# Altium PCB PCB1.PcbDoc
Units mm, origin at the board's own origin, x right, y up, seen from the top; angles counter-clockwise.
Board outline 19.29 x 100 mm, 2 copper layers (Top Layer, Bottom Layer); 23 components, 11 nets, 34 pads, 10 vias.
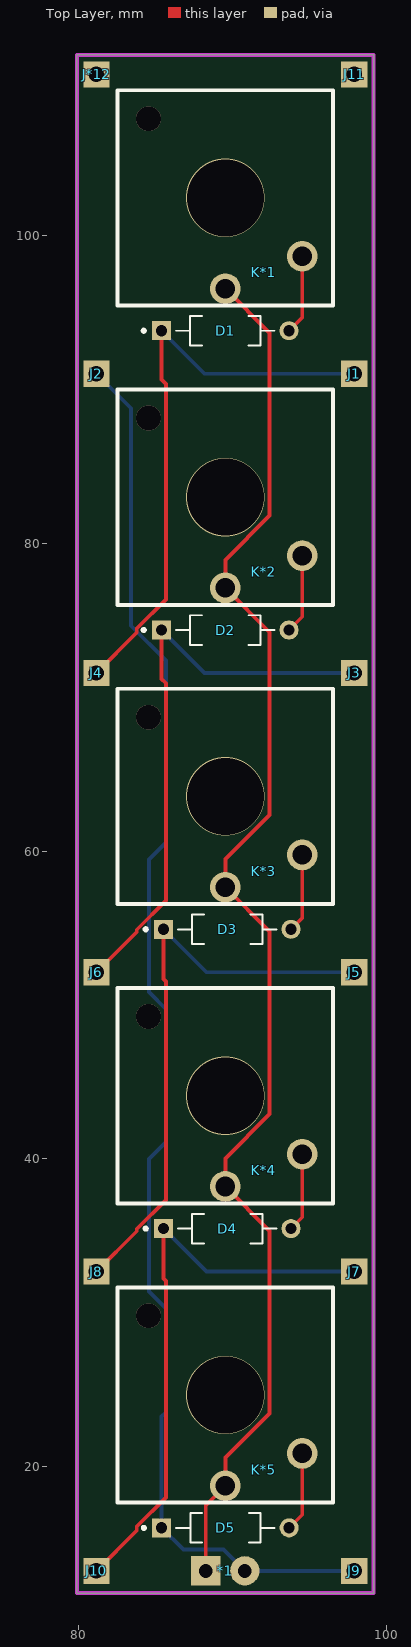
[diagram p0: Top Layer view]
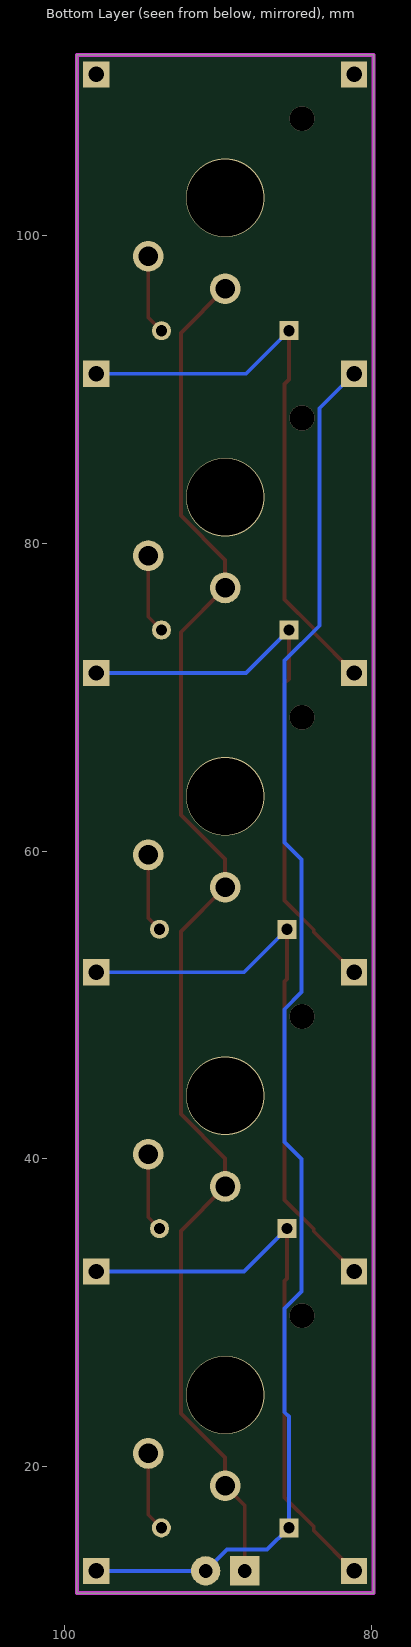
[diagram p1: Bottom Layer view, seen from below]

## Layer stack, top to bottom
Top Solder: solder mask 0.0102, Solder Resist, Dk 3.5
Top Layer: signal copper 0.0356
Dielectric 1: dielectric 0.32, FR-4, Dk 4.8
Bottom Layer: signal copper 0.0356
Bottom Solder: solder mask 0.0102, Solder Resist, Dk 3.5

## Board outline
79.883,11.76 79.883,111.76 99.173,111.76 99.173,11.76

## Design rules (kind name [scope] priority, off if disabled: settings)
Clearance [All] p1: gap=0.203 ignorepadtopadclearanceinfootprint=FALSE
PolygonConnect [All] p1: connectstyle=Relief reliefconductorwidth=0.254 reliefentries=4 polygonreliefangle="90 Angle" airgapwidth=0.254
RoutingVias [All] p1: holewidth=0.711 width=1.27 viastyle="Through Hole" minholewidth=0.711 minwidth=1.27 maxholewidth=0.711 maxwidth=1.27
SolderMaskExpansion [All] p1: expansion=0.102 istentingtop=FALSE
Width [All] p1: maxlimit=0.254 minlimit=0.254 preferedwidth=0.254
30 further rules are at their usual default settings.

## Components (designator, comment, footprint, x,y, rotation, side; value= is the part's Value field where it differs from the comment)
*1 "2Pin" TH2.54-2pin 89.528,13.208 r0 top locked
D1 "1N4148" 1N4148 89.528,93.828 r0 top
D2 "1N4148" 1N4148 89.528,74.371 r0 top
D3 "1N4148" 1N4148 89.655,54.915 r0 top
D4 "1N4148" 1N4148 89.655,35.458 r0 top
D5 "1N4148" 1N4148 89.535,16.002 r0 top
J1 "1Pin" 1PIN#1 97.917,91.313 r90 top
J2 "1Pin" 1PIN#1 81.153,91.313 r90 top
J3 "1Pin" 1PIN#2 97.917,74.041 r90 top
J4 "1Pin" 1PIN#3 81.153,72.517 r90 top
J5 "1Pin" 1PIN#4 97.917,52.959 r90 top
J6 "1Pin" 1PIN#5 81.153,53.34 r90 top
J7 "1Pin" 1PIN#6 97.917,33.655 r90 top
J8 "1Pin" 1PIN#7 81.153,34.036 r90 top
J9 "1Pin" 1PIN#8 98.552,14.478 r90 top
J10 "1Pin" 1PIN#9 64.389,14.859 r90 top
J11 "1Pin" 1PIN#10 97.917,110.49 r90 top
J*12 "1Pin" 1PIN#10 81.153,110.49 r90 top
K*1 "Choc v2" "CHOCO V2" 89.535,102.464 r270 top
K*2 "Choc v2" "CHOCO V2" 89.535,83.007 r270 top
K*3 "Choc v2" "CHOCO V2" 89.535,63.551 r270 top
K*4 "Choc v2" "CHOCO V2" 89.535,44.094 r270 top
K*5 "Choc v2" "CHOCO V2" 89.535,24.638 r270 top

## Footprints (in the part's own frame and the unit in brackets; to place one, negate y for a bottom-side part, rotate by r counter-clockwise, add the part's x,y. Pads: shape width x height; smd on the part's side, far side on the other; paste and mask are expansions set on the pad)
1N4148 [mm]
  round 1.238 hole 0.73: A(4.146,0)
  rect 1.238x1.238 hole 0.73: C(-4.146,0)
  silkscreen extent -5.4,-0.96 3.2,0.96
1PIN#1 [mm]
  rect 1.7x1.7 hole 1: 1(-0.279,0)
1PIN#2 [mm]
  rect 1.7x1.7 hole 1: 1(-2.464,0)
1PIN#3 [mm]
  rect 1.7x1.7 hole 1: 1(-0.94,0)
1PIN#4 [mm]
  rect 1.7x1.7 hole 1: 1(-0.838,0)
1PIN#5 [mm]
  rect 1.7x1.7 hole 1: 1(-1.219,0)
1PIN#6 [mm]
  rect 1.7x1.7 hole 1: 1(-0.991,0)
1PIN#7 [mm]
  rect 1.7x1.7 hole 1: 1(-1.372,0)
1PIN#8 [mm]
  rect 1.7x1.7 hole 1: 1(-1.27,0.635)
1PIN#9 [mm]
  rect 1.7x1.7 hole 1: 1(-1.651,-16.764)
1PIN#10 [mm]
  rect 1.7x1.7 hole 1: 1(0,0)
"CHOCO V2" [mm]
  round 2 hole 1.27: 1(5.9,0) 2(3.8,5)
  silkscreen extent -7,-7 7,7
TH2.54-2pin [mm]
  rect 1.9x1.9 hole 0.9: 1(-1.27,0)
  round 1.9 hole 0.9: 2(1.27,0)

## Via types
v1: diameter 1.61, hole 1.6, Top Layer to Bottom Layer, 5 vias
v2: diameter 5.1, hole 5, Top Layer to Bottom Layer, 5 vias

## Nets (pads, with @x,y where several pads share a name; then routed paths per layer and width w, separated by ;. In a path a pad name is that pad's centre, name@x,y a point inside that pad or via, vN(x,y) a via of type N, cw(c..) or ccw(c..) an arc to the next point about the centre after c; other vN are vias at no path point)
Net*1_1: *1.1 K*1.1 K*2.1 K*3.1 K*4.1 K*5.1 | length 93.4
  Top Layer w0.254: *1.1 88.258,17.461 K*5.1 89.535,20.565 92.415,23.445 92.415,35.314 K*4.1 89.535,40.021 92.415,42.901 92.415,54.771 K*3.1 89.535,59.478 92.415,62.358 92.415,74.227 K*2.1 89.535,78.934 92.415,81.814 92.415,93.683 K*1.1
Net*1_2: *1.2 D5.C J2.1 J9.1 | length 92.5
  Bottom Layer w0.254: J2.1 83.4,88.787 83.4,74.648 85.67,72.378 85.67,60.553 84.56,59.443 84.56,50.825 85.67,49.715 85.67,41.097 84.56,39.986 84.56,31.369 85.67,30.258 85.67,23.517 85.389,23.236 D5.C 86.806,14.585 89.421,14.585 *1.2 J9.1
NetD1_A: D1.A K*1.2 | length 5.2
  Top Layer w0.254: D1.A 94.535,94.689 K*1.2
NetD1_C: D1.C J1.1 J4.1 | length 37.9
  Top Layer w0.254: J4.1 83.773,74.197 83.773,74.467 85.67,76.364 85.67,90.367 85.382,90.655 D1.C
  Bottom Layer w0.254: D1.C 88.176,91.034 J1.1
NetD2_A: D2.A K*2.2 | length 5.2
  Top Layer w0.254: D2.A 94.535,75.232 K*2.2
NetD2_C: D2.C J3.1 J6.1 | length 37.9
  Top Layer w0.254: J6.1 83.773,54.741 83.773,54.884 85.67,56.781 85.67,70.911 85.382,71.199 D2.C
  Bottom Layer w0.254: D2.C 88.176,71.577 J3.1
NetD3_A: D3.A K*3.2 | length 5.1
  Top Layer w0.254: D3.A 94.535,55.649 K*3.2
NetD3_C: D3.C J5.1 J8.1 | length 37.8
  Top Layer w0.254: J8.1 83.773,35.284 83.773,35.427 85.67,37.325 85.67,51.518 85.509,51.679 D3.C
  Bottom Layer w0.254: D3.C 88.303,52.121 J5.1
NetD4_A: D4.A K*4.2 | length 5.1
  Top Layer w0.254: D4.A 94.535,36.192 K*4.2
NetD4_C: D4.C J7.1 J10.1 | length 37.8
  Top Layer w0.254: J10.1 83.773,15.828 83.773,16.091 85.67,17.988 85.67,32.061 85.509,32.223 D4.C
  Bottom Layer w0.254: D4.C 88.303,32.664 J7.1
NetD5_A: D5.A K*5.2 | length 5.2
  Top Layer w0.254: D5.A 94.535,16.856 K*5.2
pads on no net: J11.1 J*12.1
copper on no net:
  other v1: 84.535,29.788 84.535,49.244 84.535,68.701 84.535,88.157 84.535,107.614
  other v2: 89.535,24.638 89.535,44.094 89.535,63.551 89.535,83.007 89.535,102.464

## Keep-outs
Keep-Out Layer:
  the board outline again, w0.254